# Altium PCB PCB2.PcbDoc
Units mm, origin at the board's own origin, x right, y up, seen from the top; angles counter-clockwise.
Board outline 31.75 x 35.56 mm, 2 copper layers (Top Layer, Bottom Layer); 14 components, 26 nets, 74 pads, 8 vias.
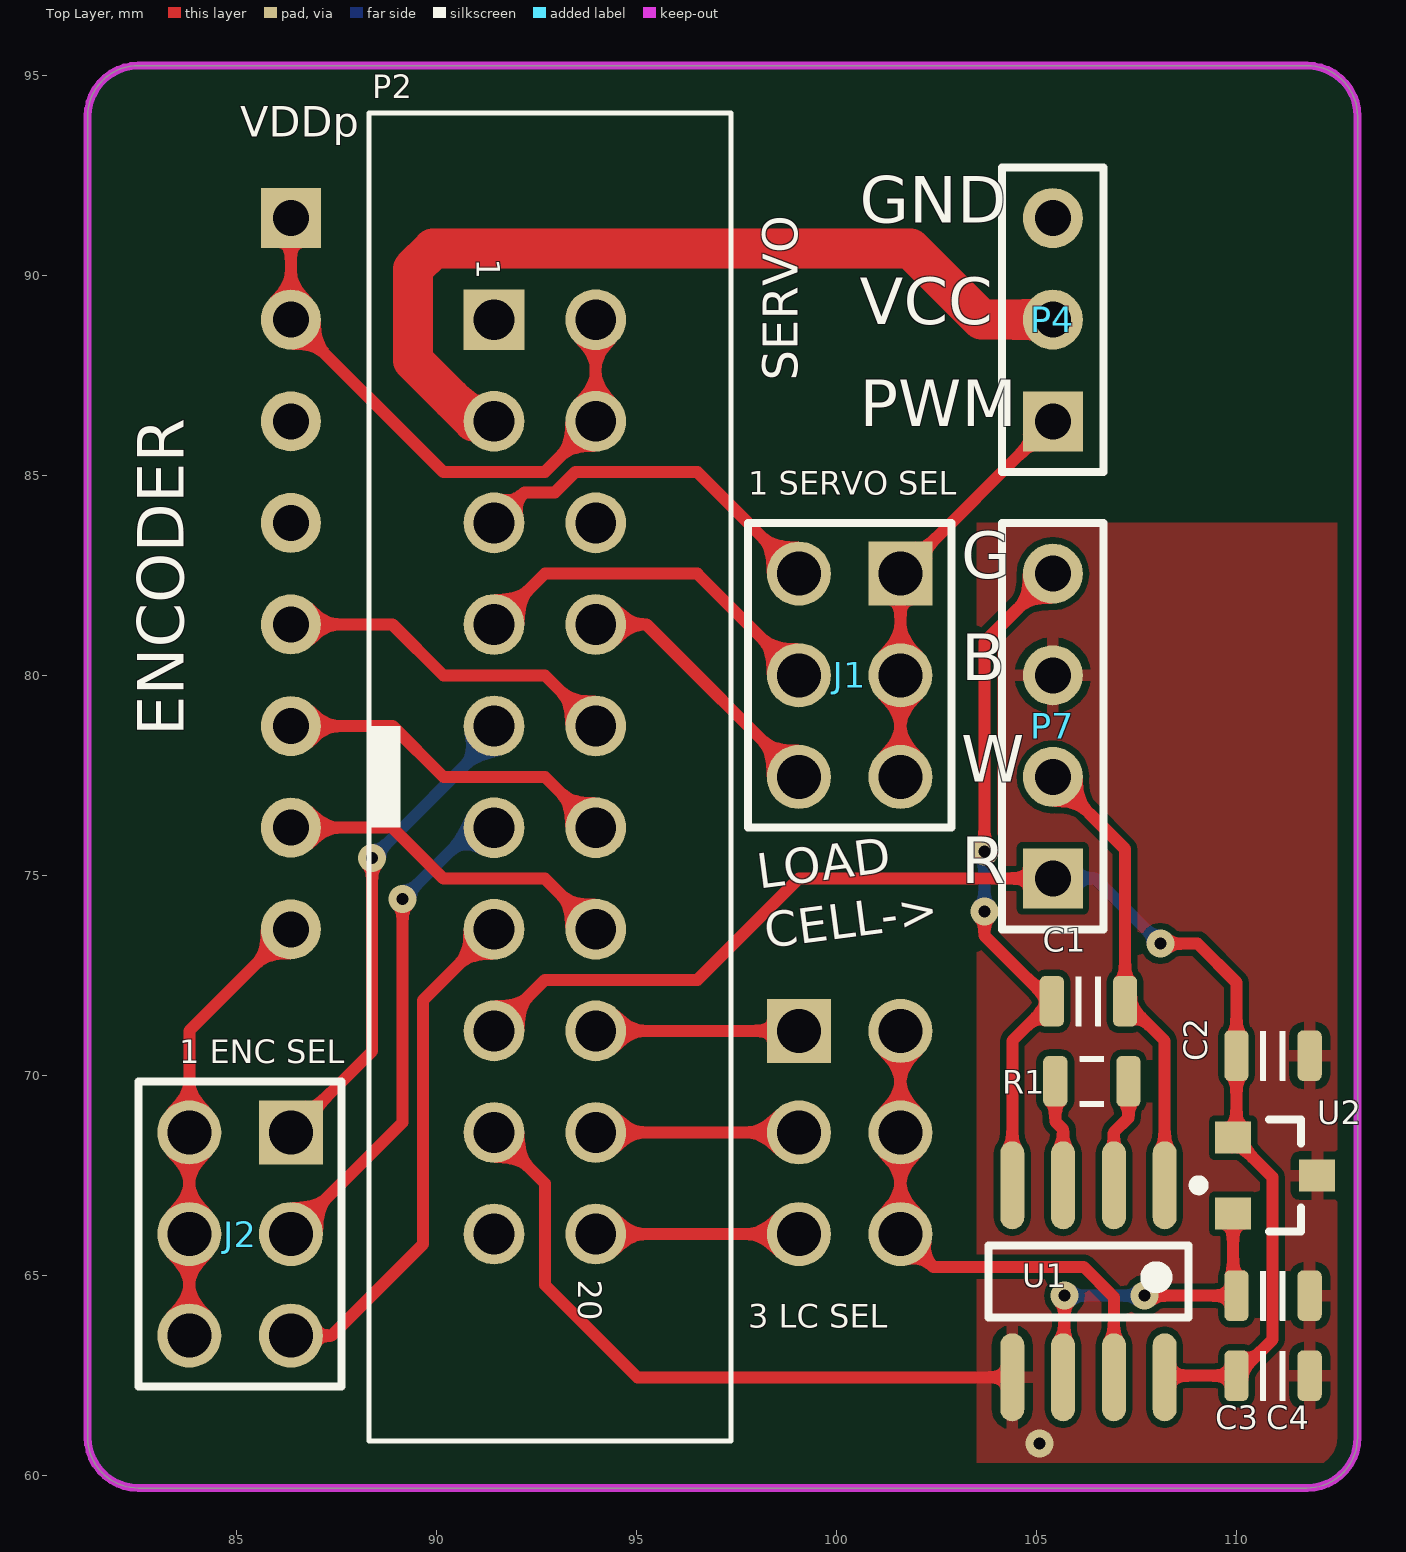
[diagram p0: Top Layer view]
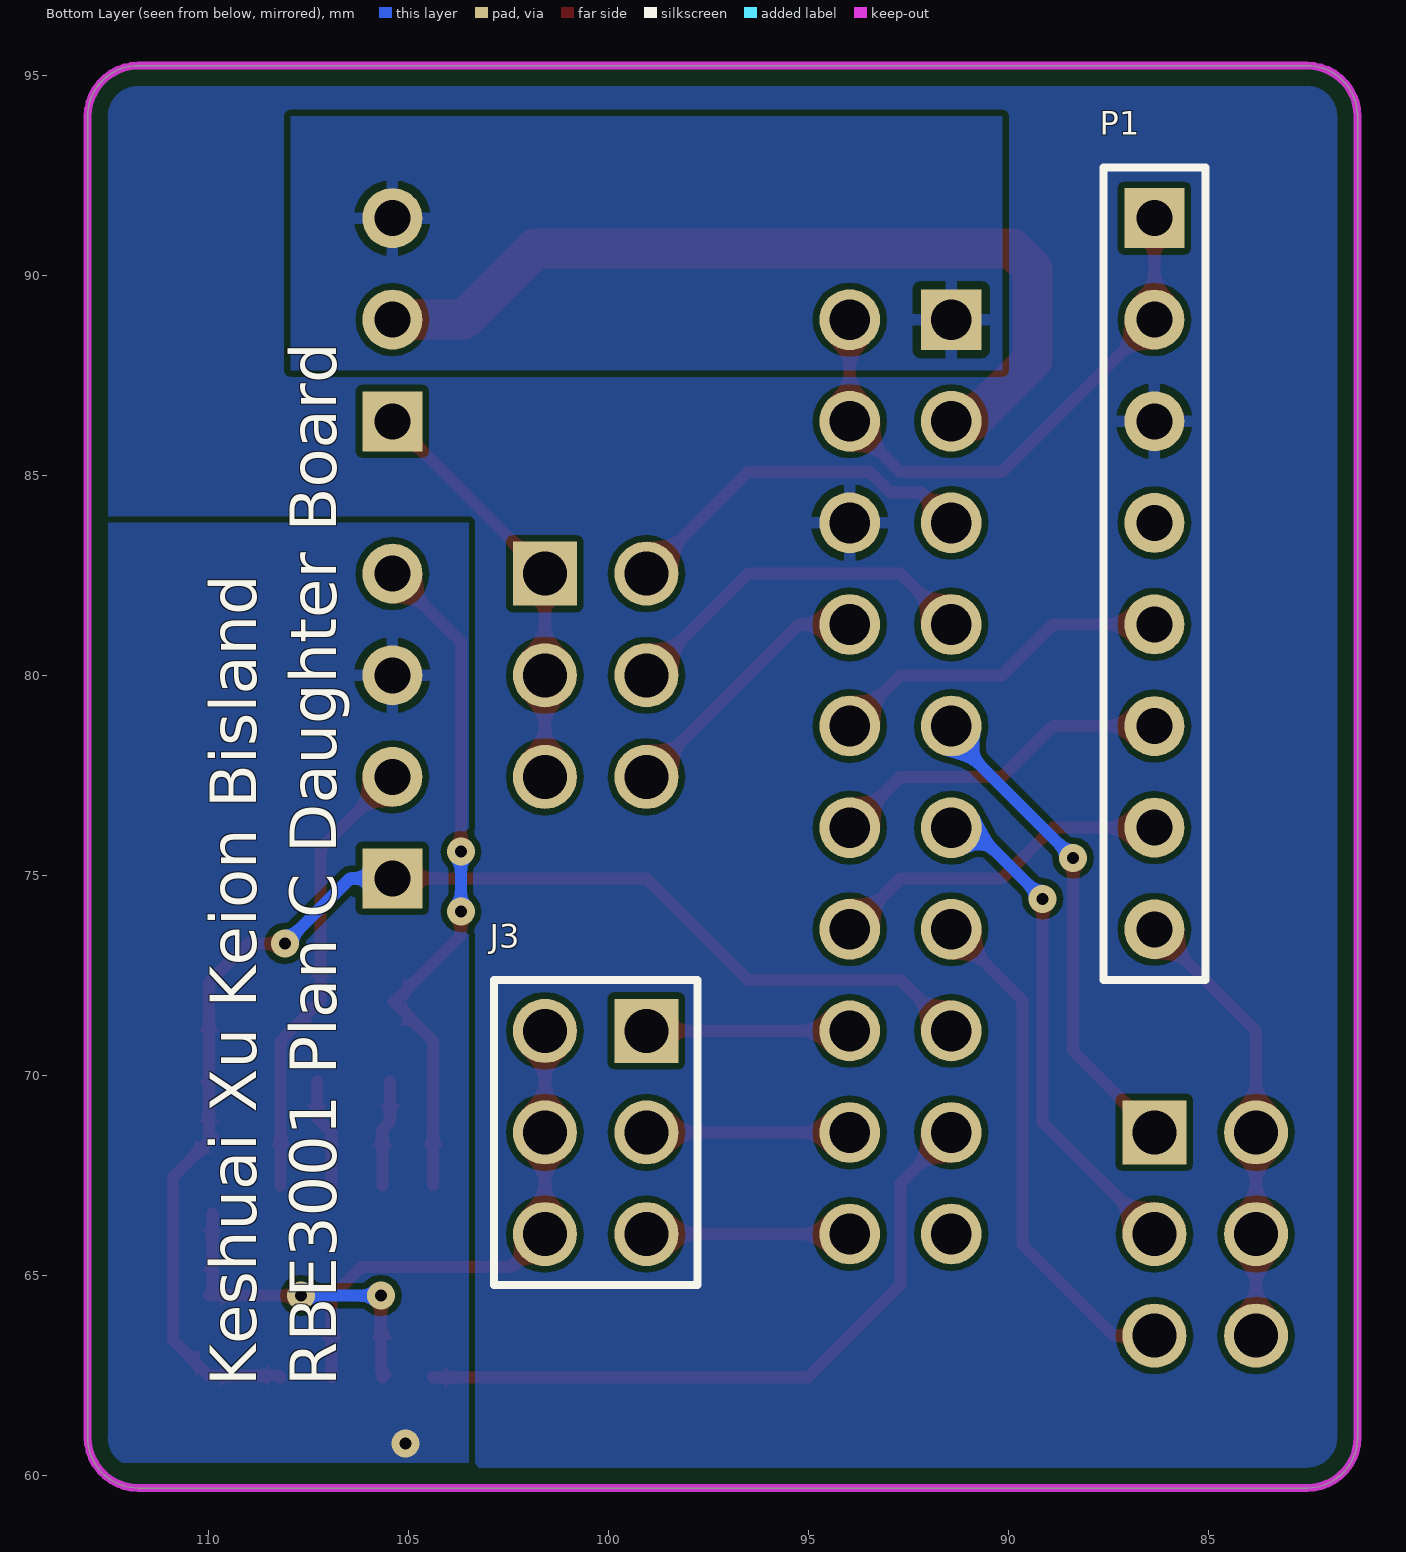
[diagram p1: Bottom Layer view, seen from below]
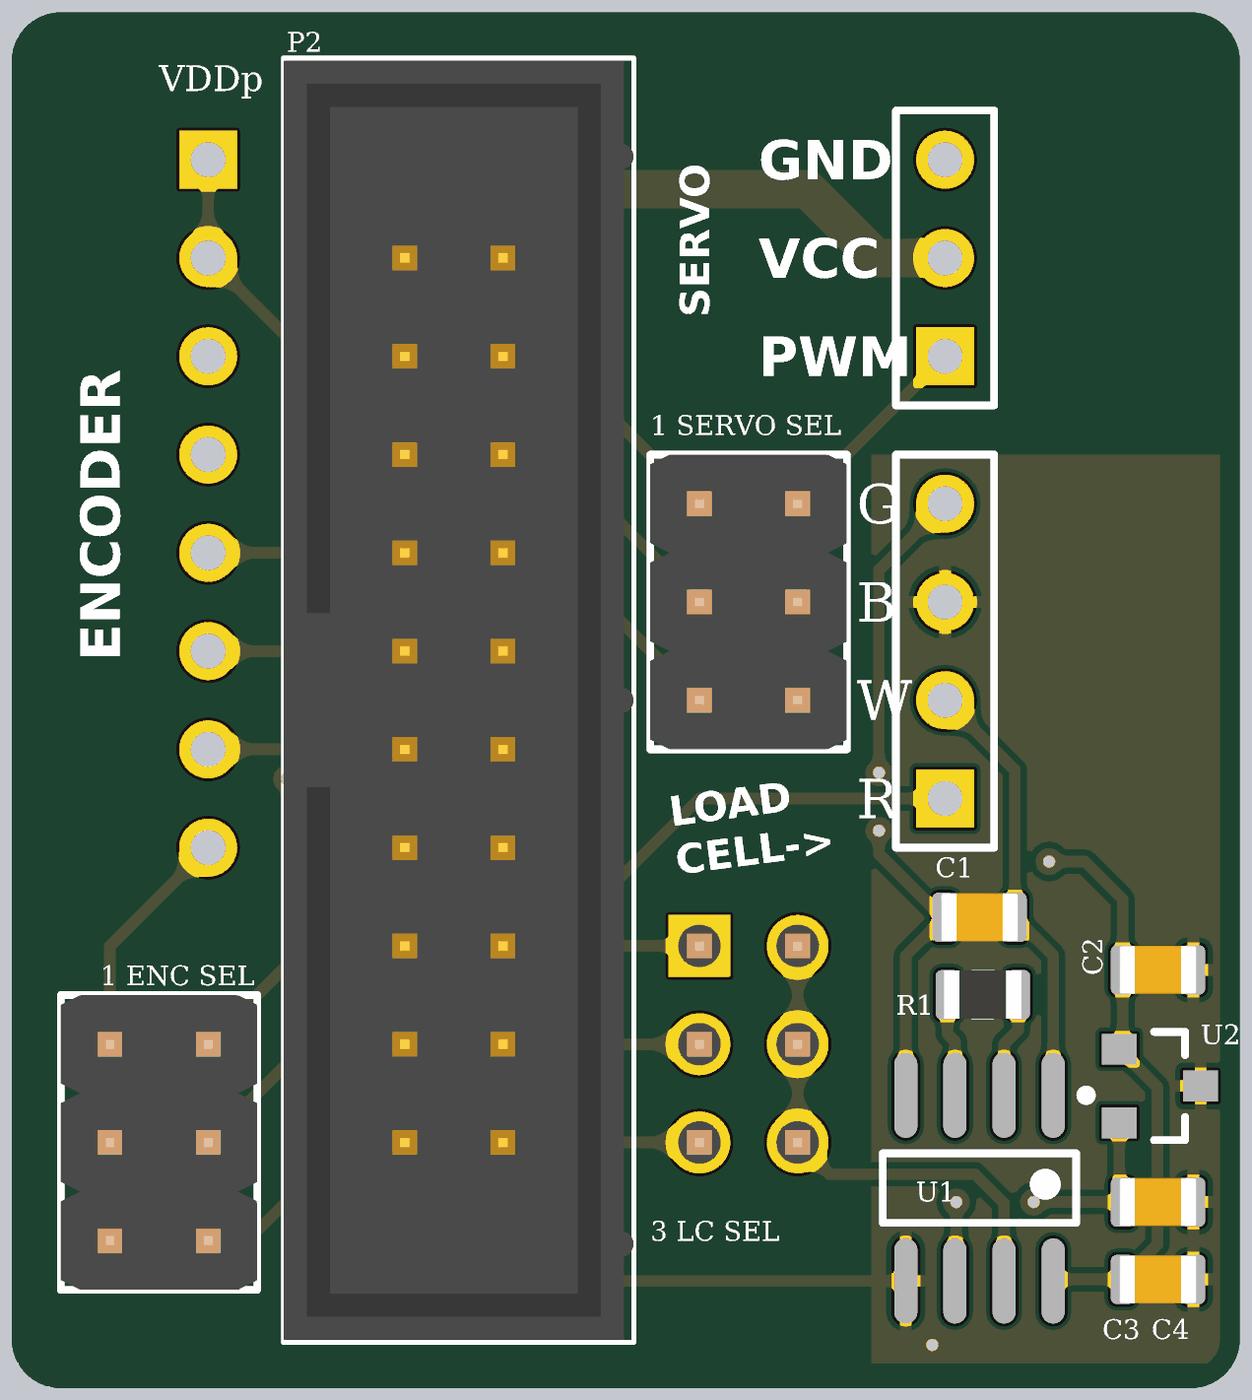
[diagram p2: 3D render of the assembled board from above, using the file's embedded part models]

## Layer stack, top to bottom
Top Solder: solder mask 0.0102, Solder Resist, Dk 3.5
Top Layer: signal copper 0.0356
Dielectric 1: dielectric 0.32, FR-4, Dk 4.8
Bottom Layer: signal copper 0.0356
Bottom Solder: solder mask 0.0102, Solder Resist, Dk 3.5

## Board outline
81.28,60.96 ccw(c82.55,60.96) 82.55,59.69 111.76,59.69 ccw(c111.76,60.96) 113.03,60.96 113.03,93.98 ccw(c111.76,93.98) 111.76,95.25 82.55,95.25 ccw(c82.55,93.98) 81.28,93.98

## Design rules (kind name [scope] priority, off if disabled: settings)
BoardOutlineClearance [InNetClass('All Nets')] p1: gap=0.381 ignorepadtopadclearanceinfootprint=FALSE
Clearance BoardEdge [All vs OnLayer('Keep-Out Layer')] p1: gap=0.4 ignorepadtopadclearanceinfootprint=FALSE
Clearance "Stitching GND" [IsStitchingVia and InNet('GND') vs (IsVia and (Not IsStitchingVia)) Or IsPad] p2 off: gap=0.127 ignorepadtopadclearanceinfootprint=FALSE except(0: Arc-Hole Track-Hole SMDPad-Hole THPad-Hole Via-Hole Fill-Hole Poly-Hole Region-Hole Text-Hole)
Clearance Clearance_outlinepolygon [inPolygon vs OnLayer('Keep-Out Layer')] p3 off: gap=0.4 ignorepadtopadclearanceinfootprint=FALSE except(0: Arc-Hole Track-Hole SMDPad-Hole THPad-Hole Via-Hole Fill-Hole Poly-Hole Region-Hole Text-Hole)
Clearance Clearance-polygonpolygon [InPolygon vs InPolygon] p4 off: gap=0.5 ignorepadtopadclearanceinfootprint=FALSE except(0: Arc-Hole Track-Hole SMDPad-Hole THPad-Hole Via-Hole Fill-Hole Poly-Hole Region-Hole Text-Hole)
Clearance Clearance_2 [All] p5: gap=0.16 ignorepadtopadclearanceinfootprint=FALSE
ComponentClearance [InComponentClass('no-clearance-check')] p1: gap=-999 collisioncheckmode=3 verticalgap=-999 showdistances=FALSE
ComponentClearance ComponentClearance_4 [All] p2: gap=0.254 collisioncheckmode=3 verticalgap=0.254 showdistances=FALSE
HoleSize [All] p1: absolutevalues=TRUE maxlimit=6 minlimit=0.3 maxpercent=80.000 minpercent=20.000
MinimumAnnularRing ignore [(HasFootprint('LMZ21701SIL') OR HasFootprint('m3 hole') OR HasFootprint('G3T-12AH'))] p1: minimumring=0
MinimumAnnularRing [All] p2: minimumring=0.178
MinimumSolderMaskSliver [All] p1: minsoldermaskwidth=0.076
NetAntennae [All] p1: netantennaetolerance=2
PolygonConnect PolygonConnect_heat [IsVia OR InPolygonClass('nothermalrelief') OR InPadClass('heatsink')] p1: connectstyle=Direct reliefconductorwidth=0.254 reliefentries=4 polygonreliefangle="90 Angle" airgapwidth=0.254
PolygonConnect [All] p2: connectstyle=Relief reliefconductorwidth=0.3 reliefentries=4 polygonreliefangle="90 Angle" airgapwidth=0.2
RoutingVias [All] p1: holewidth=0.3 width=0.3 viastyle="Through Hole" minholewidth=0.3 minwidth=0.62 maxholewidth=6.731 maxwidth=7.62 viatemplateguid#1={ECAECEE0-98E7-41BA-9EC3-9AF7EEB56C01} viatemplatename#1=signal
SilkToSilkClearance [All] p1 off: silktosilkclearance=0
SilkToSolderMaskClearance SilkToSolderMaskClearance_1 [HasFootprint('PAD-JUMPER-2-NO_YES_SILK')] p1: minsilkscreentomaskgap=0 clearancetoexposedcopper=TRUE
SilkToSolderMaskClearance [IsPad] p2: minsilkscreentomaskgap=0.15 clearancetoexposedcopper=TRUE
SolderMaskExpansion [All] p1: expansion=0.076
Width [All] p1: maxlimit=25.375 minlimit=0.152 preferedwidth=0.3
24 further rules are at their usual default settings.

## Classes and differential pairs
component class Sheet2: C1 C3 C4 J1 J2 J3 P1 P2 P4 P7 R1 U1 U2

## Components (designator, comment, footprint, x,y, rotation, side; value= is the part's Value field where it differs from the comment)
C1 "Cap_0805" CAP_0805 106.3,71.86 r180 top value=0.1uf
C2 "Cap_0805" CAP_0805 110.914,70.5 r0 top value=0.1uf
C3 "Cap_0805" CAP_0805 110.914,62.5 r0 top value=0.1uf
C4 "Cap_0805" CAP_0805 110.914,64.5 r0 top value=0.1uf
J1 "servo pwm jumper" 61300621121 100.33,80.01 r270 top
J2 "encoder chip select jumper" 61300621121 85.09,66.04 r270 top
J3 "load cell jumper" 61300621121 100.33,68.58 r270 bottom
P1 "encoder" HDR1X8 86.36,91.44 r270 bottom
P2 "hephaestus bus" 612020235121 92.71,77.47 r270 top
P4 "servo" HDR1X3 105.41,86.36 r90 top
P7 "Header 4" HDR1X4 105.41,74.93 r90 top
R1 "gain setting" RES_0805 106.386,69.86 r180 top value=1K
U1 "load cell amplifier" TI-D8_N 106.3,64.86 r270 top
U2 "voltage reference 1.6V MAX6018BEUR16+T" SOT23-3 110.914,67.5 r270 top

## Footprints (in the part's own frame and the unit in brackets; to place one, negate y for a bottom-side part, rotate by r counter-clockwise, add the part's x,y. Pads: shape width x height; smd on the part's side, far side on the other; paste and mask are expansions set on the pad)
61300621121 [mm] "6 pins, dual pin, straight, gold plating"
  rect 1.6x1.6 hole 1.1: 1(-2.54,1.27)
  round 1.6 hole 1.1: 2(0,1.27) 3(2.54,1.27) 4(-2.54,-1.27) 5(0,-1.27) 6(2.54,-1.27)
  silkscreen extent -3.81,-2.54 3.81,2.54, body extent -3.81,-2.54 3.81,2.54, height 8.57
612020235121 [mm] "20 pins, straight, gold plating"
  rect 1.52x1.52 hole 1.02: 1(-11.43,-1.27)
  round 1.52 hole 1.02: 2(-11.43,1.27) 3(-8.89,-1.27) 4(-8.89,1.27) 5(-6.35,-1.27) 6(-6.35,1.27) 7(-3.81,-1.27) 8(-3.81,1.27) 9(-1.27,-1.27) 10(-1.27,1.27) 11(1.27,-1.27) 12(1.27,1.27) 13(3.81,-1.27) 14(3.81,1.27) 15(6.35,-1.27) 16(6.35,1.27) 17(8.89,-1.27) 18(8.89,1.27) 19(11.43,-1.27) 20(11.43,1.27)
  silkscreen extent -16.6,-4.4 16.6,4.65, body extent -16.53,-4.4 16.53,4.65, height 9.1
CAP_0805 [mil]
  rrect50% 24x50 smd: 1(-36,0) 2(36,0)
  silkscreen extent -12,-24 12,24, body extent -39,-25 39,25, height 39
HDR1X3 [mm] "Connector; Header; 3 Position"
  rect 1.5x1.5 hole 0.9: 1(0,0)
  round 1.5 hole 0.9: 2(2.54,0) 3(5.08,0)
  silkscreen extent -1.27,-1.27 6.35,1.27
HDR1X4 [mm] "Connector; Header; 4 Position"
  rect 1.5x1.5 hole 0.9: 1(0,0)
  round 1.5 hole 0.9: 2(2.54,0) 3(5.08,0) 4(7.62,0)
  silkscreen extent -1.27,-1.27 8.89,1.27
HDR1X8 [mm] "Connector; Header; 8 Position"
  rect 1.5x1.5 hole 0.9: 1(0,0)
  round 1.5 hole 0.9: 2(2.54,0) 3(5.08,0) 4(7.62,0) 5(10.16,0) 6(12.7,0) 7(15.24,0) 8(17.78,0)
  silkscreen extent -1.27,-1.27 19.05,1.27
RES_0805 [mil]
  rrect50% 24x50 smd: 1(-36,0) 2(36,0)
  silkscreen extent -12,-24 12,24, body extent -39,-25 39,25, height 24
SOT23-3 [mil]
  rect 31.5x35.43 smd: 1(-37.4,-39.37) 2(37.4,-39.37) 3(0,43.31)
  silkscreen extent -55,-4 55,28
TI-D8_N [mm] "SOIC, 8-Leads, Body 5x4mm, Pitch 1.27mm, IPC Medium Density"
  oval 2.2x0.6 smd: 1(-2.4,1.905) 2(-2.4,0.635) 3(-2.4,-0.635) 4(-2.4,-1.905) 5(2.4,-1.905) 6(2.4,-0.635) 7(2.4,0.635) 8(2.4,1.905)
  silkscreen extent -2.52,-2.5 0.9,2.88, body extent -2,-2.5 2,2.5, height 1.75

## Part data
C1 C2 C3 C4: "Capacitor"
J1 J2 J3: library part 61300621121, "WR-PHD 2.54 mm THT Dual Pin Header, 06p", ComponentLink1Description=Manufacturer, ComponentLink1URL=http://www.we-online.de, ComponentLink2Description=Datasheet, ComponentLink2URL=http://katalog.we-online.de/em/datasheet/6130xx21121.pdf, PartNumber=61300621121, PinNumber=06p, PublishedDate="July 2016", Publisher="Wurth Elektronik"
P1: library part "Header 8", "Header, 8-Pin", LatestRevisionDate=17-Jul-2002, LatestRevisionNote="Re-released for DXP Platform.", Publisher="Altium Limited"
P2: library part 612020235121, "WR-BHD 2.54mm Male Box Header High Temperature", Manufacturer="Wurth Elektronik", ComponentLink1 Description=Manufacturer, ComponentLink1URL=http://www.we-online.com, ComponentLink2 Description=Datasheet, ComponentLink2URL=http://katalog.we-online.de/em/datasheet/6120xx235121.pdf, Created by="Baojun Chen", Created Date="March 2016", NoPins=20, partNo=612020235121
P4: library part "Header 3", "Header, 3-Pin", LatestRevisionDate=17-Jul-2002, LatestRevisionNote="Re-released for DXP Platform.", Publisher="Altium Limited"
P7: "Header, 4-Pin", LatestRevisionDate=17-Jul-2002, LatestRevisionNote="Re-released for DXP Platform.", Publisher="Altium Limited"
R1: library part Res_0805, "Resistor"
U1: library part INA826AIDR, "Precision, 200-uA Supply Current, 36-V Supply Instrumentation Amplifier, -40 to 125 degC, 8-pin SOIC (D8), Green (RoHS & no Sb/Br)", Input Bias Current (+/-)(Max)(nA)=65, Manufacturer="Texas Instruments", Quiescent Current (+/-)(Typ)(mA)=0.2, Supplier Part Number 1=296-30238-2-ND, CMRR(Min)(dB)=84, Code_JEDEC=MS-012, ComponentLink1Description="Manufacturer URL", ComponentLink1URL=http://www.ti.com/, ComponentLink2Description=Datasheet, ComponentLink2URL=http://www.ti.com/general/docs/lit/getliterature.tsp?genericPartNumber=INA826&fileType=pdf, ComponentLink3Description="Package Specification", ComponentLink3URL=http://www.ti.com/litv/pdf/msoi002j, DatasheetVersion=SBOS562E, Eco-Plan="Green (RoHS & no Sb/Br)", Gain(V/V)="1 to 1000", Input Offset (+/-)(Max)(uV)=150, Input Offset Drift (+/-)(Max)(uV/Degrees Celsius)=2, Mounting Technology="Surface Mount", Noise at 1kHz(Typ)(nV/rt(Hz))=18, Non-Linearity (+/-)(Max)(%)=0.0005, Number of Channels=1, Output Offset (+/-)(Max)(uV)=700, Output Offset Drift (+/-)(Max)(uV/Degrees Celsius)=10, PackageDescription="8-Pin Plastic Small Outline, Body 4.9 x 3.9 mm, Pitch 1.27 mm", PackageReference=D8, PackageVersion="4040047-3/M, 06/2011", PartNumber=INA826AIDR, SubFamily="Single Supply", Supplier 1=Digi-Key, Supplier 2=Digi-Key, Supplier 3=Digi-Key, Supplier 4=Newark, Supplier 5=Mouser, Supplier Part Number 2=296-30238-1-ND, Supplier Part Number 3=296-30238-6-ND, Supplier Part Number 4=82T3832, Supplier Part Number 5=595-INA826AIDR, Vs(Max)(V)=36, Vs(Min)(V)=2.7
U2: library part "Header 3", "MAX6018BEUR16+T", LatestRevisionDate=17-Jul-2002, LatestRevisionNote="Re-released for DXP Platform.", Publisher="Altium Limited"

## Via types
v1: diameter 0.7, hole 0.3, Top Layer to Bottom Layer, tented both sides, 8 vias

## Nets (pads, with @x,y where several pads share a name; then routed paths per layer and width w, separated by ;. In a path a pad name is that pad's centre, name@x,y a point inside that pad or via, vN(x,y) a via of type N, cw(c..) or ccw(c..) an arc to the next point about the centre after c; other vN are vias at no path point)
AGND: C2.2 C3.2 C4.2 P2.17 P7.3 U1.5 U2.3 | length 17
  Top Layer w0.3: P2.17 92.71,67.31 92.71,64.77 95.02,62.46 U1.5
  other v1: 105.08,60.808
CS1: J2.1 P2.9 | length 12.3
  Top Layer w0.3: J2.1 88.392,70.612 v1(88.392,75.438)
  Bottom Layer w0.3: v1(88.392,75.438) 91.44,78.486 P2.9
CS2: J2.2 P2.11 | length 12.6
  Top Layer w0.3: J2.2 89.154,68.834 v1(89.154,74.422)
  Bottom Layer w0.3: v1(89.154,74.422) 90.932,76.2 P2.11
CS3: J2.3 P2.13 | length 12.9
  Top Layer w0.3: J2.3 87.376,63.5 89.662,65.786 89.662,71.882 P2.13
GND: P1.3 P2.6
LC1: J3.1 P2.16 | length 5.1
  Top Layer w0.3: P2.16 J3.1
LC2: J3.2 P2.18 | length 5.1
  Top Layer w0.3: P2.18 J3.2
LC3: J3.3 P2.20 | length 5.1
  Top Layer w0.3: P2.20 J3.3
M+: P2.3 P4.2 | length 21.9
  Top Layer w1: P2.3 90.932,86.36 89.408,87.884 89.408,90.17 89.916,90.678 101.854,90.678 103.632,88.9 P4.2
M-: P2.1 P4.3
MISO: P1.6 P2.12 | length 8.7
  Top Layer w0.3: P1.6 88.9,78.74 90.17,77.47 92.71,77.47 P2.12
MOSI: P1.5 P2.10 | length 8.7
  Top Layer w0.3: P1.5 88.9,81.28 90.17,80.01 92.71,80.01 P2.10
NetC1_1: C1.1 P7.2 U1.1 | length 11.4
  Top Layer w0.3: P7.2 107.214,75.666 C1.1 108.205,70.869 U1.1
NetC1_2: C1.2 P7.4 U1.4 | length 17.1
  Top Layer w0.3: v1(103.7,74.1) 103.7,73.5 105.34,71.86 C1.2 104.395,70.869 U1.4 ; v1(103.7,75.6) 103.7,80.84 P7.4
  Bottom Layer w0.3: v1(103.7,74.1) v1(103.7,75.6)
NetC4_1: C4.1 U1.6 U2.2 | length 8.5
  Top Layer w0.3: U1.6 105.6,62.525 105.7,62.625 v1(105.7,64.5) ; v1(107.7,64.5) C4.1 109.914,64.586 U2.2
  Bottom Layer w0.3: v1(105.7,64.5) v1(107.7,64.5)
NetJ1_1: J1.1 J1.2 J1.3 P4.1 | length 10.5
  Top Layer w0.3: J1.3 J1.2 J1.1 P4.1
NetJ2_4: J2.4 J2.5 J2.6 P1.8 | length 11.2
  Top Layer w0.3: J2.6 J2.5 J2.4 83.82,71.12 P1.8
NetJ3_4: J3.4 J3.5 J3.6 U1.7 | length 13.1
  Top Layer w0.3: J3.4 J3.5 J3.6 102.42,65.22 106.18,65.22 106.935,64.465 U1.7
NetR1_1: R1.1 U1.2 | length 2.8
  Top Layer w0.3: U1.2 106.935,68.581 107.3,68.946 R1.1
NetR1_2: R1.2 U1.3 | length 2.7
  Top Layer w0.3: R1.2 105.471,68.854 105.665,68.66 U1.3
PWM1: J1.4 P2.5 | length 9.2
  Top Layer w0.3: P2.5 92.202,84.582 92.964,84.582 93.472,85.09 96.52,85.09 J1.4
PWM2: J1.5 P2.7 | length 9.2
  Top Layer w0.3: P2.7 92.71,82.55 96.52,82.55 J1.5
PWM3: J1.6 P2.8 | length 6.7
  Top Layer w0.3: P2.8 95.25,81.28 J1.6
SCK: P1.7 P2.14 | length 8.7
  Top Layer w0.3: P1.7 88.9,76.2 90.17,74.93 92.71,74.93 P2.14
VCC33: P1.1 P1.2 P2.2 P2.4 | length 14.8
  Top Layer w0.3: P1.1 P1.2 90.17,85.09 92.71,85.09 P2.4 P2.2
VCCA: C2.1 C3.1 P2.15 P7.1 U1.8 U2.1 | length 33.7
  Top Layer w0.3: P2.15 92.71,72.39 96.52,72.39 99.06,74.93 P7.1 ; v1(108.1,73.3) 109.029,73.3 110,72.329 C2.1 110,68.536 U2.1 110.9,67.464 110.9,63.4 C3.1 108.245,62.5 U1.8
  Bottom Layer w0.3: P7.1 106.47,74.93 v1(108.1,73.3)
pads on no net: P1.4 P2.19

## Polygon pours and split planes (outlines as drawn)
AGND on Top Layer "AGND_L01_P002" (solid, pour order 2): 113.03,83.82 103.505,83.82 103.505,60.325 113.03,60.325
GND on Bottom Layer "GND" (solid, pour order 7): 113.03,59.69 81.28,59.69 81.28,95.25 113.03,95.25
M- on Bottom Layer "M-" (solid, pour order 3): 90.17,93.98 107.95,93.98 107.95,87.63 90.17,87.63
AGND on Bottom Layer "AGND" (solid, pour order 0): 113.03,83.82 103.505,83.82 103.505,60.325 113.03,60.325

## Keep-outs
Keep-Out Layer:
  the board outline again, w0.2

## Silkscreen, mask and mechanical layers (free items; w line width, h text height)
Top Overlay:
  text "VDDp" at 85.09,93.218 h1.3
  text "GND" at 100.584,90.932 h2
  text "VCC" at 100.584,88.392 h2
  text "SERVO" at 99.314,87.376 h1.5 r90
  text "PWM" at 100.584,85.852 h2
  text "1 SERVO SEL" at 97.79,84.328 h1
  text "G" at 103.124,82.042 h2
  text "B" at 103.124,79.502 h2
  text "ENCODER" at 84.074,78.486 h2 r90
  text "W" at 103.124,76.962 h2
  text "R" at 103.124,74.422 h2
  text "LOAD / CELL->" at 98.298,72.898 h1.5 r7.43
  text "1 ENC SEL" at 83.566,70.104 h1
  text "3 LC SEL" at 97.79,63.5 h1
Bottom Overlay:
  text "Keshuai Xu Keion Bisland / RBE3001 Plan C Daughter Board" at 106.426,62.23 h2 r270

## Text inside footprints (layer, text, board x,y; h text height)
P2: Top Overlay "20" at 93.345,64.897 h1 r270; Top Overlay "1" at 90.805,90.424 h1 r270